# Altium PCB DW1000Breakout.PcbDoc (part 1 of 2)
Units mil, origin at the board's own origin, x right, y up, seen from the top; angles counter-clockwise.
Board outline 2406.34 x 2150.41 mil, 4 copper layers (Component Side, Ground Plane, Power Plane, Solder Side), stack 58 mil thick; 76 components, 60 nets, 321 pads, 242 vias.
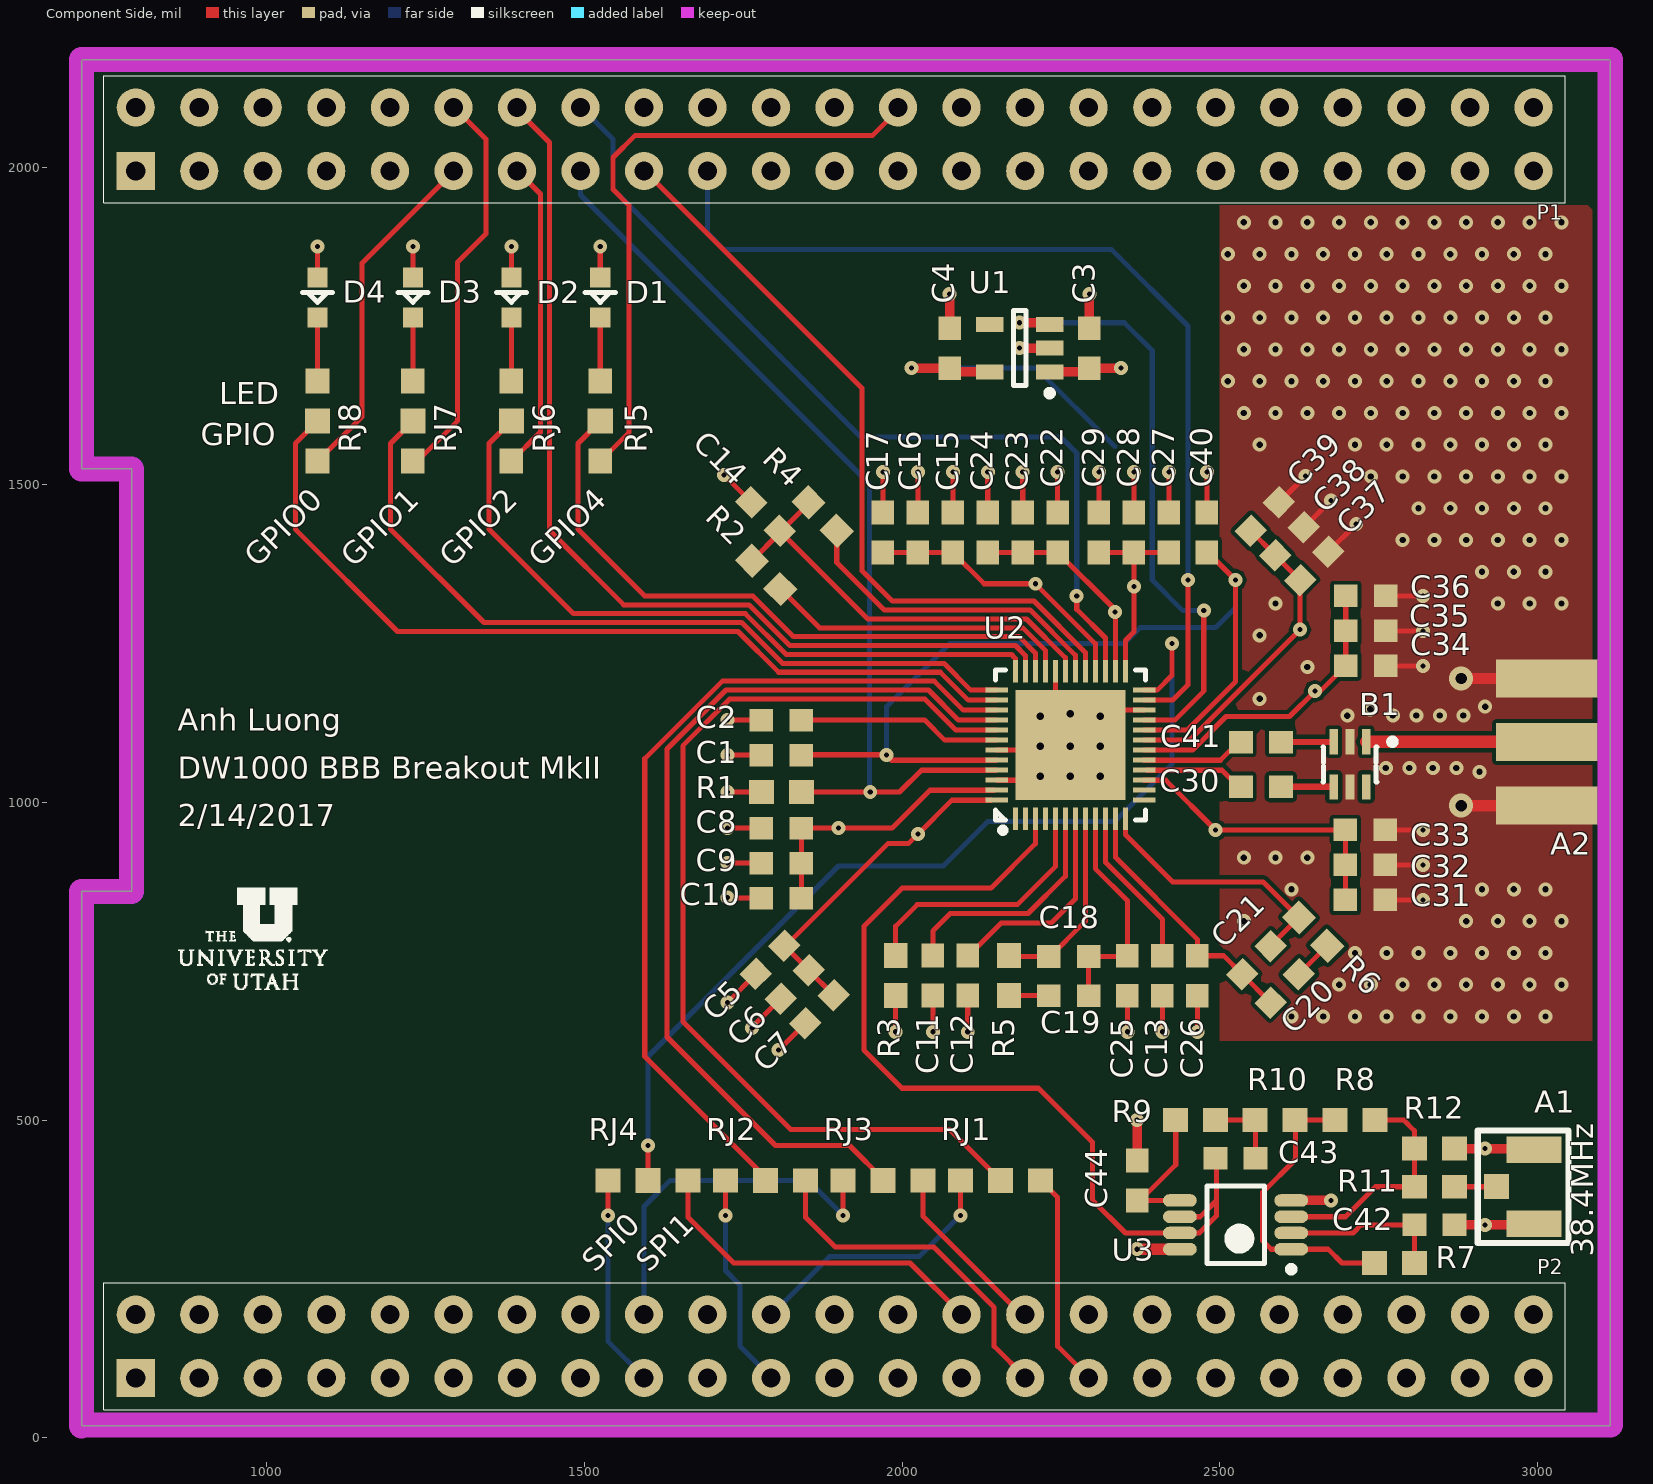
[diagram p0: Component Side view]
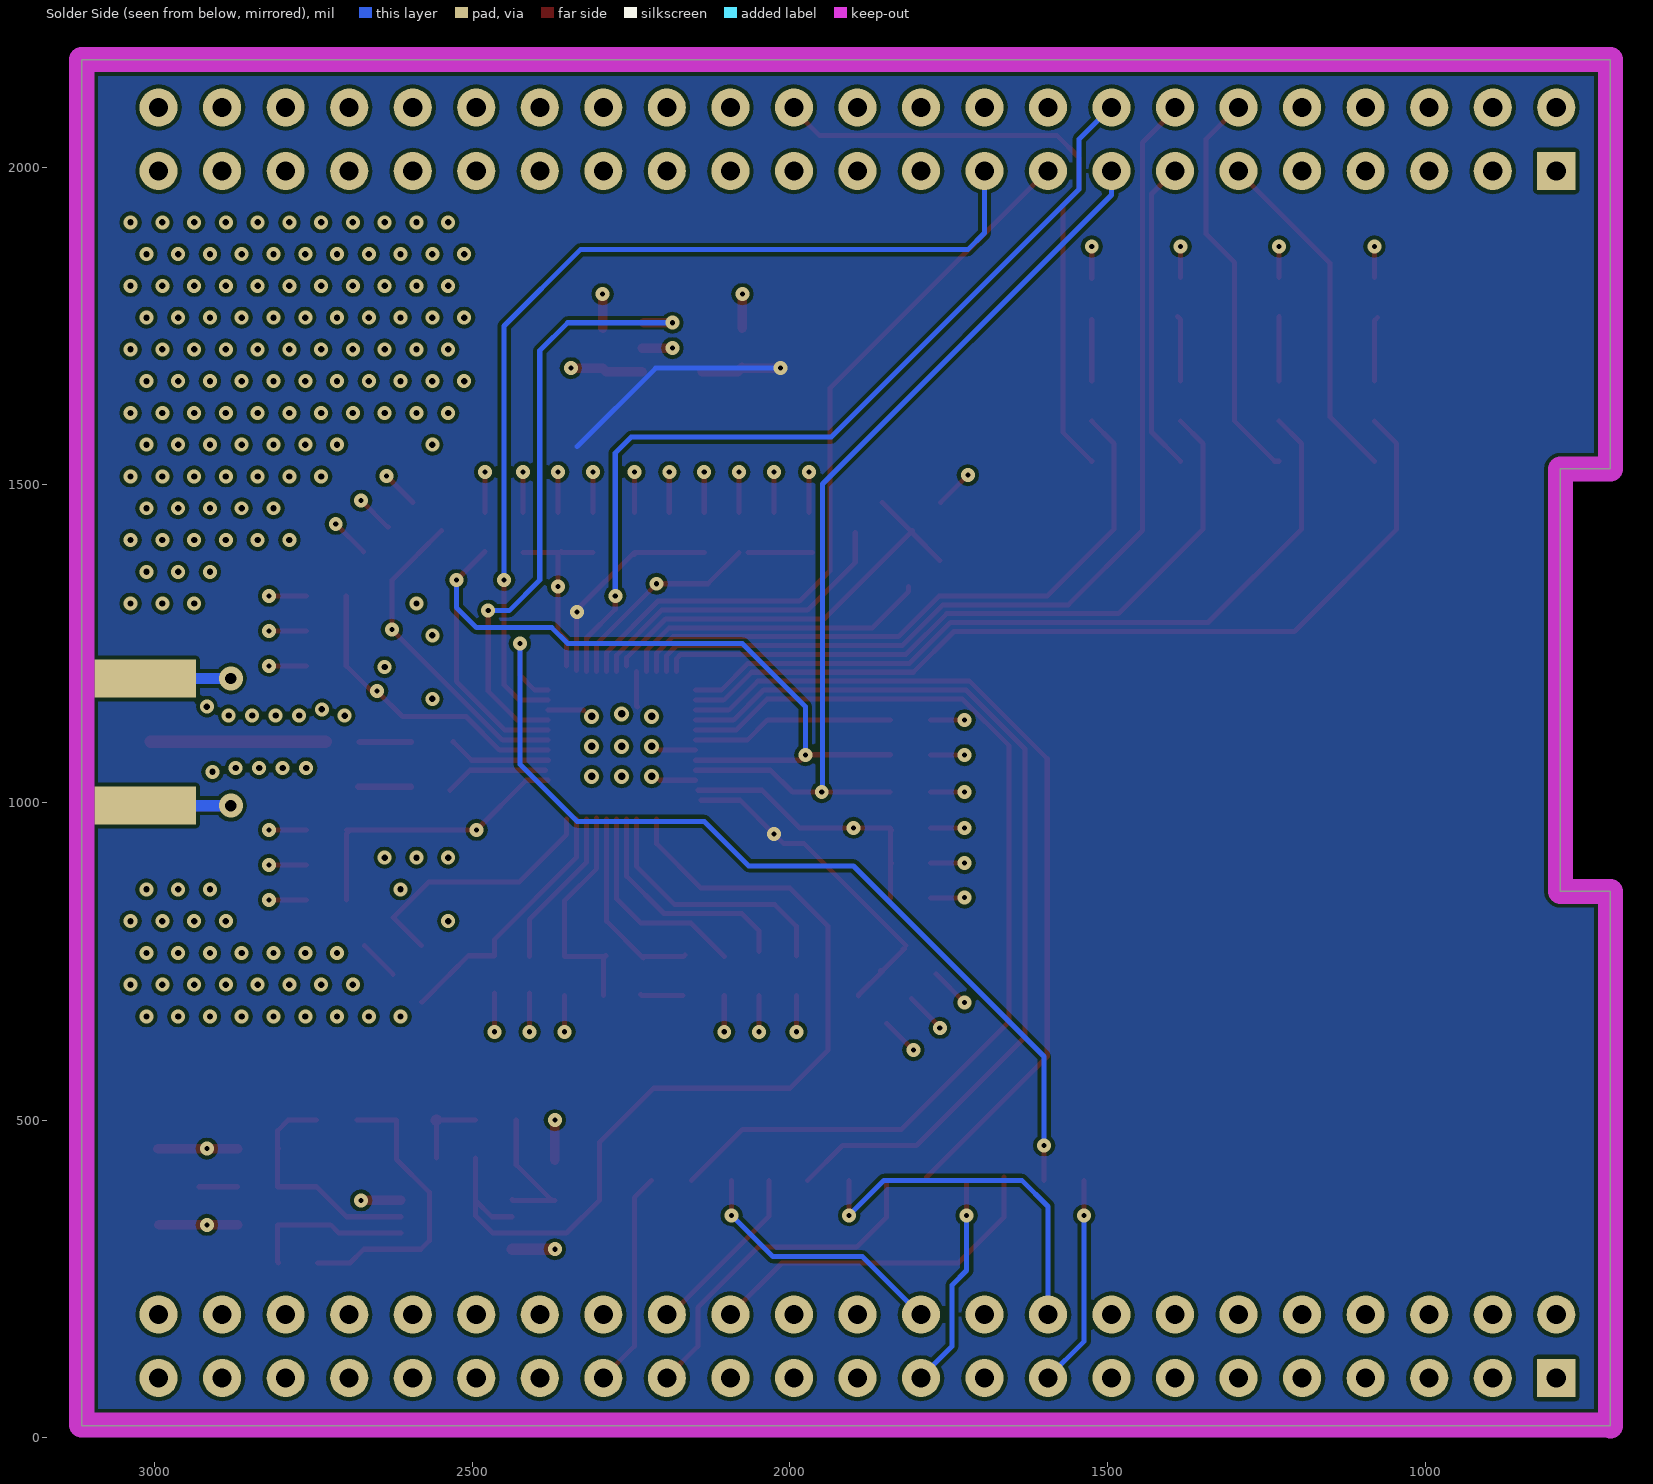
[diagram p1: Solder Side view, seen from below]
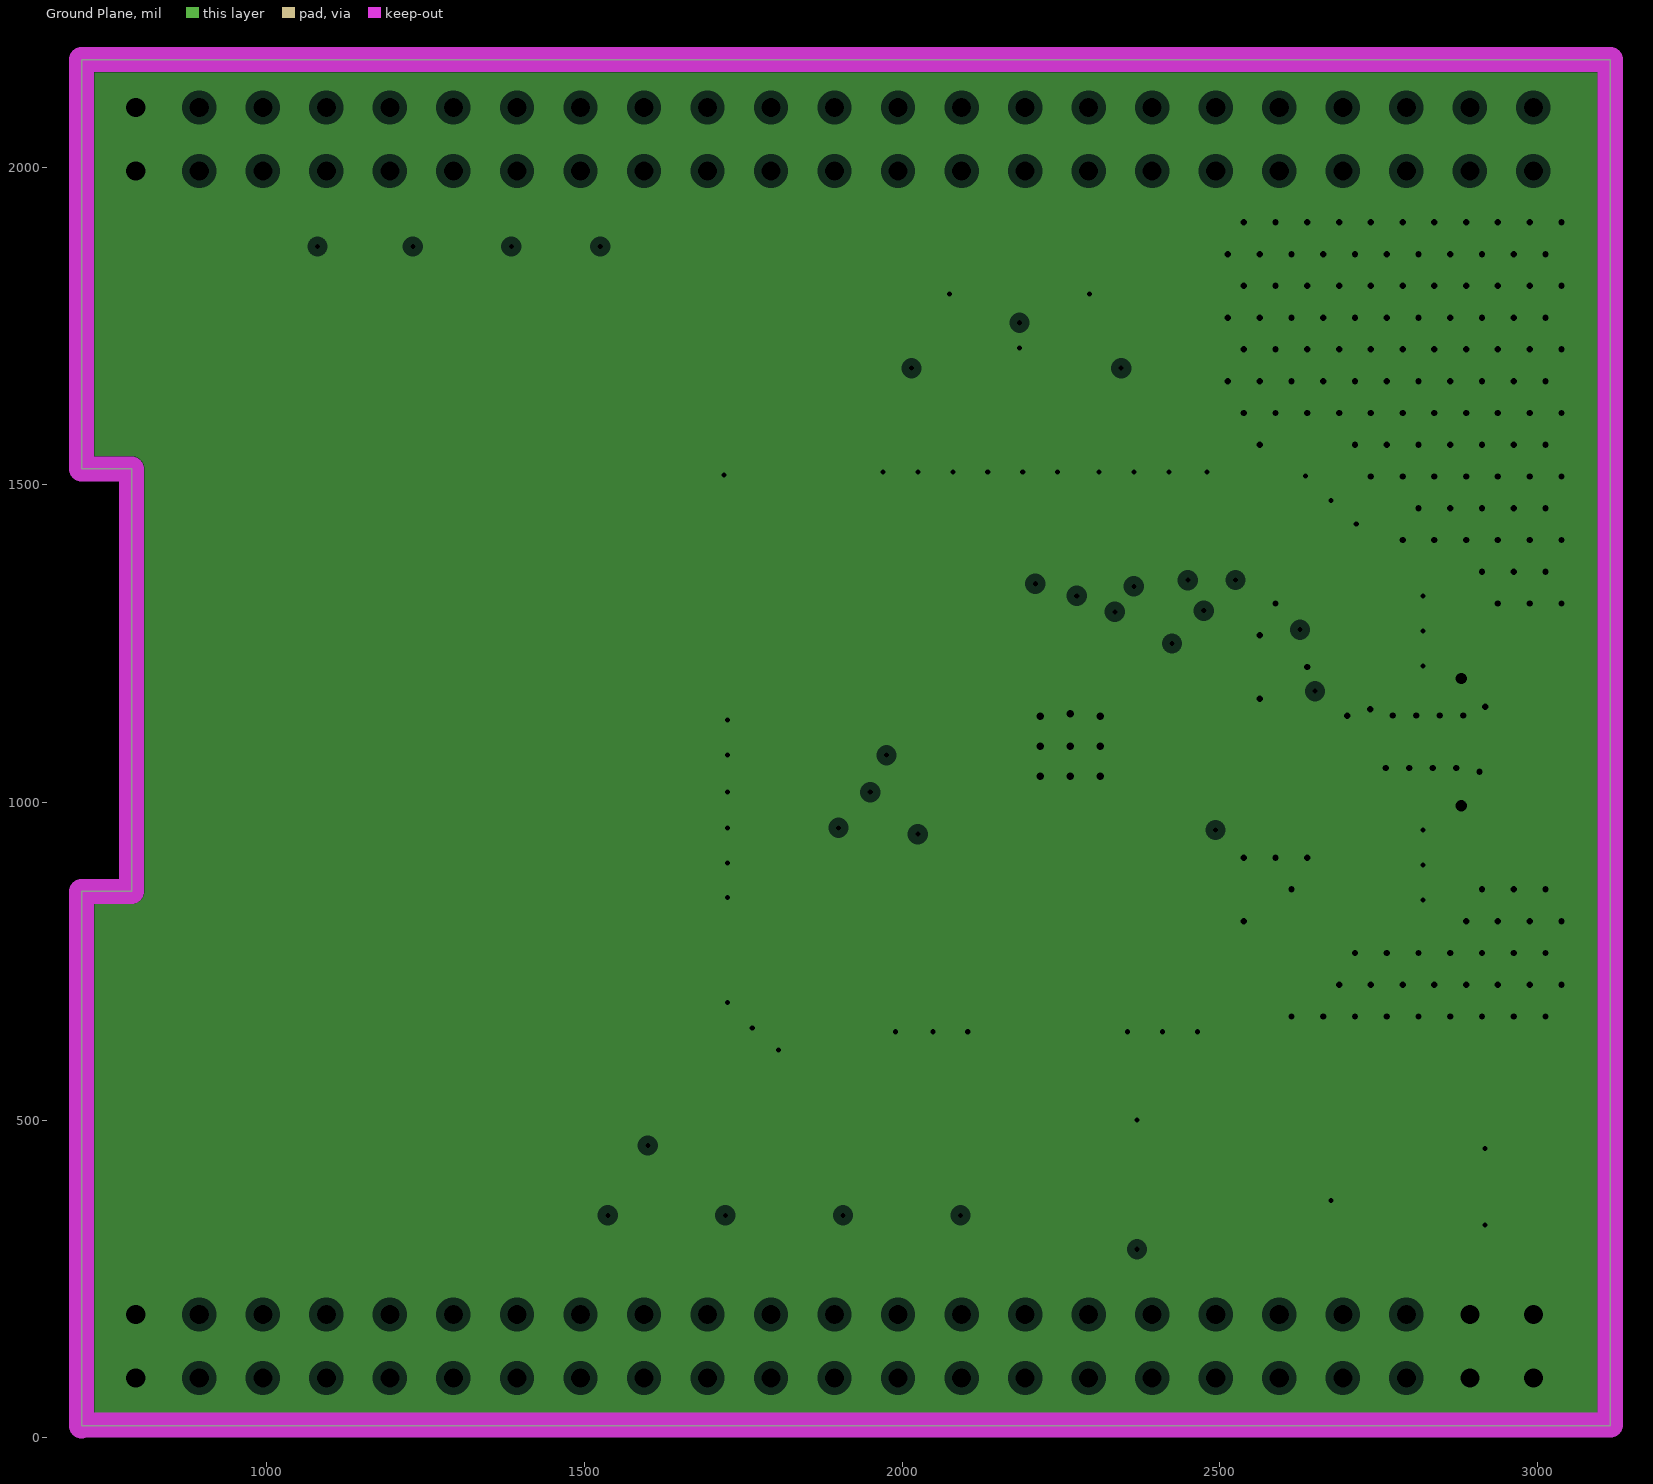
[diagram p2: Ground Plane, clearances drawn from the general rule]
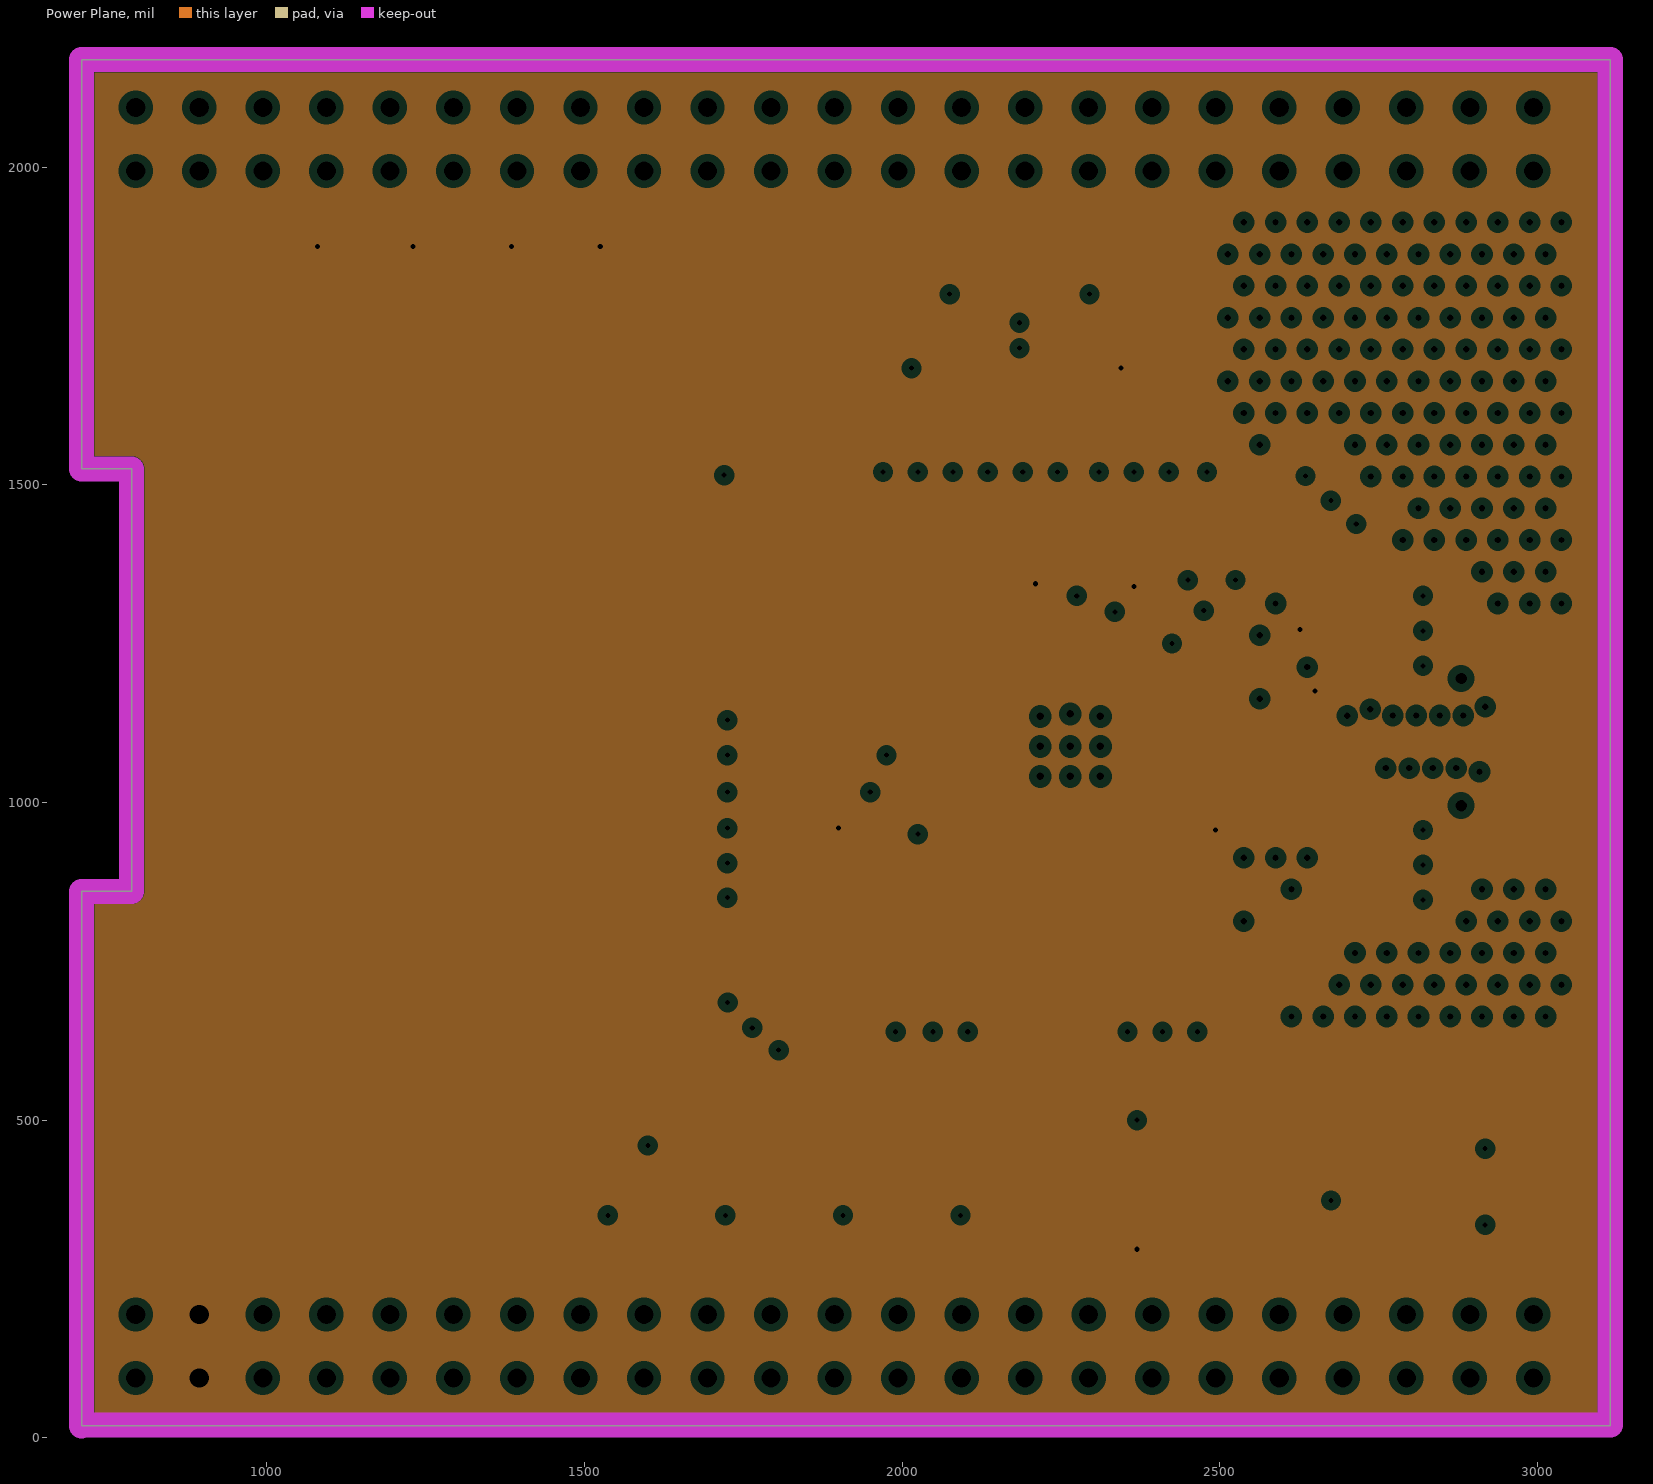
[diagram p3: Power Plane, clearances drawn from the general rule]

## Layer stack, top to bottom
Top Solder: solder mask 0.4, Solder Resist, Dk 3.5
Component Side: signal copper 1.7
Dielectric 1: core 11.9, FR-4, Dk 4.5
Ground Plane: plane copper 1.4, net GND
Dielectric 3: prepreg 28, Core, Dk 4.5
Power Plane: plane copper 1.4, net 3V3
Dielectric 4: core 11.9, FR-4, Dk 4.5
Solder Side: signal copper 1.7
Bottom Solder: solder mask 0.4, Solder Resist, Dk 3.5

## Board outline
708.66,18.73 708.66,860 787.4,860 787.4,1525 708.66,1525 708.66,2169.14 3115,2169.14 3115,18.73

## Design rules (kind name [scope] priority, off if disabled: settings)
Clearance "Clearance~Sunstone Circuits" [All] p1: gap=6 ignorepadtopadclearanceinfootprint=FALSE except(0: Arc-Hole Track-Hole SMDPad-Hole THPad-Hole Via-Hole Fill-Hole Poly-Hole Region-Hole Text-Hole) // Sunstone Circuits Minimum Clearance Rule (MLB~4&6 Layer Designs)
HoleSize "HoleSize~Sunstone Circuits" [All] p1: absolutevalues=TRUE maxlimit=251 minlimit=8 maxpercent=80.000 minpercent=20.000 // Sunstone Circuits Hole Size Rule (MLB~4&6 Layer Designs)
HoleSize Testpoint [All] p2: absolutevalues=TRUE maxlimit=100 minlimit=1 maxpercent=80.000 minpercent=20.000
HoleSize TestPointUsage [All] p3: absolutevalues=TRUE maxlimit=100 minlimit=1 maxpercent=80.000 minpercent=20.000
MinimumAnnularRing "MinimumAnnularRing~Sunstone Circuits" [All] p1: minimumring=7 // Sunstone Circuits Minimum Annular Ring (MLB~4&6 Layer Designs)
PlaneClearance "PlaneClearance~Sunstone Circuits" [All] p1: clearance=12 // Sunstone Circuits Power Plane Clearance Rule (MLB~4&6 Layer Designs)
PlaneConnect "PlaneConnect~Sunstone Circuits" [All] p1: planeconnectstyle=Relief reliefexpansion=10 reliefentries=4 reliefconductorwidth=8 reliefairgap=10 // Sunstone Circuits Power Plane Connect Rule (MLB~4&6 Layer Designs)
PolygonConnect PolygonConnect_GND_Pour [IsPolygon vs InNet('GND')] p1: connectstyle=Direct reliefconductorwidth=10 reliefentries=4 polygonreliefangle="90 Angle" airgapwidth=10
PolygonConnect [IsVia] p2: connectstyle=Direct reliefconductorwidth=10 reliefentries=4 polygonreliefangle="90 Angle" airgapwidth=10
PolygonConnect "PolygonConnect~Sunstone Circuits" [All] p3: connectstyle=Relief reliefconductorwidth=8 reliefentries=4 polygonreliefangle="90 Angle" airgapwidth=10 // Sunstone Circuits Polygon Connect Style (MLB~4&6 Layer Designs)
RoutingVias "RoutingVias~Sunstone Circuits" [All] p1: holewidth=8 width=22 viastyle="Through Hole" minholewidth=8 minwidth=22 maxholewidth=20 maxwidth=40 // Sunstone Circuits Routing Vias Rule (MLB~4&6 Layer Designs)
ShortCircuit "ShortCircuit~Sunstone Circuits" [All] p1: allowed=FALSE // Sunstone Circuits Short Circuit Rule~Do Not Allow (MLB~4&6 Layer Designs)
SolderMaskExpansion "SolderMaskExpansion~Sunstone Circuits" [All] p1: expansion=3 // Sunstone Circuits Solder Mask Expansion Rule (MLB~4&6 Layer Designs)
ViasUnderSMD "ViasUnderSMD~Sunstone Circuits" [All] p1: allowed=FALSE // Sunstone Circuits Vias Under SMD~Do Not Allow (MLB~4&6 Layer Designs)
Width ANT [InNet('ANT')] p1: maxlimit=19.87 minlimit=19.87 preferedwidth=19.87 impedancedriven=TRUE minimp=50.000000 maximp=50.000000 favimp=50.000000
Width "Width~Sunstone Circuits" [All] p2: maxlimit=100 minlimit=6 preferedwidth=8 minimp=50.000000 maximp=50.000000 favimp=50.000000 // Sunstone Circuits Minimum Width Rule (MLB~4&6 Layer Designs)
26 further rules are at their usual default settings.

## Classes and differential pairs
component class DW1000BreakoutPeripherals: A1 A2 C42 C43 C44 D1 D2 D3 D4 P1 P2 R7 R8 R9 R10 R11 R12 RJ1 RJ2 RJ3 RJ4 RJ5 RJ6 RJ7 RJ8 U3 U?
component class DW1000Breakout: B1 C1 C2 C3 C4 C5 C6 C7 C8 C9 C10 C11 C12 C13 C14 C15 C16 C17 C18 C19 C20 C21 C22 C23 C24 C25 C26 C27 C28 C29 C30 C31 C32 C33 C34 C35 C36 C37 C38 C39 C40 C41 R1 R2 R3 R4 R5 R6 U1 U2

## Components (designator, comment, footprint, x,y, rotation, side; value= is the part's Value field where it differs from the comment)
A1 "U.FL-R-SMT(01)" U.FL-R-SMT-1 2995,395 r270 top
A2 "CONSMA003.062" SMA_EDGE_MNT 3015,1095 r270 top
B1 "HHM1595A1" BALUN 2705,1060 r180 top
C1 "GRM188R71C104KA01D" "CAPC1608X08N (0603)" 1810,1074.37 r0 top
C2 "GRM188R71C104KA01D" "CAPC1608X08N (0603)" 1810,1129.37 r0 top
C3 "GRM188R71C104KA01D" "CAPC1608X08N (0603)" 2295,1715 r270 top
C4 "GRM188R71C104KA01D" "CAPC1608X08N (0603)" 2075,1715 r270 top
C5 "GRM188R60J106ME47D" "CAPC1608X08N (0603)" 1792.22,752.15 r45 top
C6 "GRM188R61A105KA61D" "CAPC1608X08N (0603)" 1831.11,713.26 r45 top
C7 "GRM188R71C104KA01D" "CAPC1608X08N (0603)" 1870,674.37 r45 top
C8 "GRM188R60J106ME47D" "CAPC1608X08N (0603)" 1810,959.37 r0 top
C9 "GRM188R61A105KA61D" "CAPC1608X08N (0603)" 1810,904.37 r0 top
C10 "GRM188R71C104KA01D" "CAPC1608X08N (0603)" 1810,849.37 r0 top
C11 "GRM188R71C104KA01D" "CAPC1608X08N (0603)" 2048.48,727.4 r90 top
C12 "GRM188R71C104KA01D" "CAPC1608X08N (0603)" 2103.48,727.4 r90 top
C13 "GRM188R71C104KA01D" "CAPC1608X08N (0603)" 2409.89,727.11 r90 top
C14 "GRM188R71C104KA01D" "CAPC1608X08N (0603)" 1785,1450 r315 top
C15 "GRM188R60J106ME47D" "CAPC1608X08N (0603)" 2080,1425 r270 top
C16 "GRM188R61A105KA61D" "CAPC1608X08N (0603)" 2025,1425 r270 top
C17 "GRM188R71C104KA01D" "CAPC1608X08N (0603)" 1970,1425 r270 top
C18 "GRM1885C1H1R2CA01D" "CAPC1608X08N (0603)" 2262.31,757.4 r180 top
C19 "GRM1885C1H270JA01D" "CAPC1608X08N (0603)" 2262.31,695.91 r0 top
C20 "GRM188R71H821KA01D" "CAPC1608X08N (0603)" 2602.33,707.06 r225 top
C21 "GRM1885C1H180JA01D" "CAPC1608X08N (0603)" 2557.79,751.6 r225 top
C22 "GRM188R60J106ME47D" "CAPC1608X08N (0603)" 2245,1425 r270 top
C23 "GRM188R61A105KA61D" "CAPC1608X08N (0603)" 2190,1425 r270 top
C24 "GRM188R71C104KA01D" "CAPC1608X08N (0603)" 2135,1425 r270 top
C25 "GRM188R71C104KA01D" "CAPC1608X08N (0603)" 2354.89,727.11 r90 top
C26 "GRM188R71C104KA01D" "CAPC1608X08N (0603)" 2464.89,727.11 r90 top
C27 "GRM188R60J106ME47D" "CAPC1608X08N (0603)" 2420,1425 r270 top
C28 "GRM188R61A105KA61D" "CAPC1608X08N (0603)" 2365,1425 r270 top
C29 "GRM188R71C104KA01D" "CAPC1608X08N (0603)" 2310,1425 r270 top
C30 "GRM1885C1H120JA01D" "CAPC1608X08N (0603)" 2565,1024.57 r180 top
C31 "GRM188R60J106ME47D" "CAPC1608X08N (0603)" 2729.31,846.57 r180 top
C32 "GRM188R61A105KA61D" "CAPC1608X08N (0603)" 2729.31,901.57 r180 top
C33 "GRM188R71C104KA01D" "CAPC1608X08N (0603)" 2729.31,956.57 r180 top
C34 "GRM188R60J106ME47D" "CAPC1608X08N (0603)" 2730,1215 r180 top
C35 "GRM188R61A105KA61D" "CAPC1608X08N (0603)" 2730,1270 r180 top
C36 "GRM188R71C104KA01D" "CAPC1608X08N (0603)" 2730,1325 r180 top
C37 "GRM188R60J106ME47D" "CAPC1608X08N (0603)" 2648.86,1372.08 r225 top
C38 "GRM188R61A105KA61D" "CAPC1608X08N (0603)" 2609.97,1410.97 r225 top
C39 "GRM188R71C104KA01D" "CAPC1608X08N (0603)" 2571.08,1449.86 r225 top
C40 "GRM188R71C104KA01D" "CAPC1608X08N (0603)" 2480,1425 r270 top
C41 "GRM1885C1H120JA01D" "CAPC1608X08N (0603)" 2565,1095 r180 top
C42 "GRM033R71C102KA01D" "CAPC1608X08N (0603)" 2837.99,335 r180 top
C43 "GRM1885C1H202JA01D" "CAPC1608X08N (0603)" 2525,440 r0 top
C44 "GRM033R71C102KA01D" "CAPC1608X08N (0603)" 2370,405 r270 top
D1 "LG Q971-KN-1" CHIPLED0603 1525,1795 r270 top
D2 "LG Q971-KN-1" CHIPLED0603 1385,1795 r270 top
D3 "LG Q971-KN-1" CHIPLED0603 1230,1795 r270 top
D4 "LG Q971-KN-1" CHIPLED0603 1080,1795 r270 top
P1 "PREC023DAAN-RC" HEADER23X2 1893.83,2043.81 r0 top locked
P2 "PREC023DAAN-RC" HEADER23X2 1893.83,143.81 r0 top locked
R1 "MCR03ERTJ104" "RESC1608X06N (0603)" 1810,1016.2 r180 top
R2 "MCR03ERTJ103" "RESC1608X06N (0603)" 1786.11,1358.18 r135 top
R3 "MCR03ERTJ113" "RESC1608X06N (0603)" 1989.97,727.4 r90 top
R4 "MCR03ERTJ103" "RESC1608X06N (0603)" 1875,1450 r135 top
R5 "MCR03ERTJ163" "RESC1608X06N (0603)" 2168.48,727.4 r90 top
R6 "MCR03ERTJ271" "RESC1608X06N (0603)" 2647.23,796.5 r135 top
R7 "MCR03ERTJ180" "RESC1608X06N (0603)" 2775,275 r180 top
R8 "MCR03ERTJ102" "RESC1608X06N (0603)" 2712.99,500 r180 top
R9 "MCR03ERTJ2R7" "RESC1608X06N (0603)" 2462.33,500 r0 top
R10 "MCR03ERTJ2R7" "RESC1608X06N (0603)" 2587.29,500 r0 top
R11 "MCR03ERTJ102" "RESC1608X06N (0603)" 2837.99,395 r180 top
R12 "MCR03ERTJ102" "RESC1608X06N (0603)" 2837.99,455 r180 top
RJ1 "R_J" RJ 2155,405 r180 top value=DNP
RJ2 "R_J" RJ 1785,405 r180 top value=DNP
RJ3 "R_J" RJ 1970,405 r180 top value=DNP
RJ4 "R_J" RJ 1600,405 r180 top value=DNP
RJ5 "R_J" RJ 1525,1600 r270 top value=DNP
RJ6 "R_J" RJ 1385,1600 r270 top value=DNP
RJ7 "R_J" RJ 1230,1600 r270 top value=DNP
RJ8 "R_J" RJ 1080,1600 r270 top value=DNP
U1 "LP5907MFX-1.8/NOPB" SOT95P280X145-5N 2185,1715 r180 top
U2 "DW1000 IC" QFN-48 2265,1090 r90 top
U3 "LMV822MM/NOPB" TSOP65P490X110-8N 2525,335 r180 top

## Footprints (in the part's own frame and the unit in brackets; to place one, negate y for a bottom-side part, rotate by r counter-clockwise, add the part's x,y. Pads: shape width x height; smd on the part's side, far side on the other; paste and mask are expansions set on the pad)
BALUN [mm]
  rect 0.35x1 smd: 1(-0.65,-0.9) 2(0,-0.9) 3(0.65,-0.9) 4(0.65,0.9) 5(0,0.9) 6(-0.65,0.9)
  silkscreen extent -1.83,-1.02 1.07,0.7, body extent -1.05,-0.67 1.05,0.67, height 0.95
"CAPC1608X08N (0603)" [mm] "Chip Capacitor, 2-Leads, Body 1.60x0.80mm, IPC Medium Density"
  rect 0.95x0.9 smd: 1(-0.8,0) 2(0.8,0)
  body extent -0.85,-0.45 0.85,0.45, height 0.8
CHIPLED0603 [mm]
  rect 0.8x0.8 smd: 1(-0.8,0) 2(0.8,0)
  silkscreen extent -0.2,-0.6 0.2,0.6, body extent -0.81,-0.4 0.81,0.4, height 0.6
HEADER23X2 [mil] "HEADER23X2"
  rect 60x60 hole 30 mask+2: 1(-1100,-50)
  round 60 hole 30 mask+2: 2(-1100,50) 3(-1000,-50) 4(-1000,50) 5(-900,-50) 6(-900,50) 7(-800,-50) 8(-800,50) 9(-700,-50) 10(-700,50) 11(-600,-50) 12(-600,50) 13(-500,-50) 14(-500,50) 15(-400,-50) 16(-400,50) 17(-300,-50) 18(-300,50) 19(-200,-50) 20(-200,50) 21(-100,-50) 22(-100,50) 23(0,-50) 24(0,50) 25(100,-50) 26(100,50) 27(200,-50) 28(200,50) 29(300,-50) 30(300,50) 31(400,-50) 32(400,50) 33(500,-50) 34(500,50) 35(600,-50) 36(600,50) 37(700,-50) 38(700,50) 39(800,-50) 40(800,50) 41(900,-50) 42(900,50) 43(1000,-50) 44(1000,50) 45(1100,-50) 46(1100,50)
  silkscreen extent -1150,-100 1150,100
QFN-48 [mm] "48 Pin QFN"
  rect 0.9x0.2 smd mask+0.05: 1(-2.95,2.2) 2(-2.95,1.8) 3(-2.95,1.4) 4(-2.95,1) 5(-2.95,0.6) 6(-2.95,0.2) 7(-2.95,-0.2) 8(-2.95,-0.6) 9(-2.95,-1) 10(-2.95,-1.4) 11(-2.95,-1.8) 12(-2.95,-2.2) 25(2.95,-2.2) 26(2.95,-1.8) 27(2.95,-1.4) 28(2.95,-1) 29(2.95,-0.6) 30(2.95,-0.2) 31(2.95,0.2) 32(2.95,0.6) 33(2.95,1) 34(2.95,1.4) 35(2.95,1.8) 36(2.95,2.2)
  rect 0.2x0.9 smd mask+0.05: 13(-2.2,-2.95) 14(-1.8,-2.95) 15(-1.4,-2.95) 16(-1,-2.95) 17(-0.6,-2.95) 18(-0.2,-2.95) 19(0.2,-2.95) 20(0.6,-2.95) 21(1,-2.95) 22(1.4,-2.95) 23(1.8,-2.95) 24(2.2,-2.95) 37(2.2,2.95) 38(1.8,2.95) 39(1.4,2.95) 40(1,2.95) 41(0.6,2.95) 42(0.2,2.95) 43(-0.2,2.95) 44(-0.6,2.95) 45(-1,2.95) 46(-1.4,2.95) 47(-1.8,2.95) 48(-2.2,2.95)
  rect 4.4x4.4 smd paste-4.4 mask+0.05: 49(0,0)
  rect 1.3x1.3 on Top Paste mask+0.05: Paste1(0,0) Paste2(-1.45,1.45) Paste3(-1.45,-1.45) Paste4(1.45,-1.45) Paste5(1.45,1.45) Paste6(1.45,0) Paste7(-1.45,0) Paste8(0,1.45) Paste9(0,-1.45)
  silkscreen extent -3.5,-3 3,3, body extent -3,-3 3,3, height 1
"RESC1608X06N (0603)" [mm] "Chip Resistor, 2-Leads, Body 1.60x0.80mm, IPC Medium Density"
  rect 1x0.95 smd: 1(-0.8,0) 2(0.8,0)
  body extent -0.85,-0.45 0.85,0.45, height 0.55
RJ [mm] "0 Ohm Resistor Jumper"
  rect 1x1 smd: 1(0,0)
  rect 1x0.95 smd: 2(1.6,0) 3(-1.6,0)
  body extent -0.05,-0.45 1.65,0.45, height 0.55
SMA_EDGE_MNT [mm]
  rect 1.52x4.06 smd: 1(0,0) 2(-2.54,0) 3(2.54,0)
  rect 1.52x4.06 smd far side: 4(-2.54,0) 5(2.54,0)
  Component Side lines w0.457: 2.54,-3.429 2.54,0 ; -2.54,-3.429 -2.54,0
  Solder Side lines w0.457: 2.54,-3.429 2.54,0 ; -2.54,-3.429 -2.54,0
  body extent -3.18,-1.27 3.17,12.06, height 3.57
SOT95P280X145-5N [mm] "SOT23, 5-Leads, Body 2.90x2.80mm, Pitch 0.95mm, IPC Medium Density"
  rect 1.1x0.6 smd: 1(-1.2,0.95) 2(-1.2,0) 3(-1.2,-0.95) 4(1.2,-0.95) 5(1.2,0.95)
  silkscreen extent -1.33,-1.5 0.25,1.92, body extent -0.85,-1.5 0.85,1.5, height 1.45
TSOP65P490X110-8N [mm] "TSOP, 8-Leads, Body 3.00x3.00mm, Pitch 0.65mm, IPC Medium Density"
  oval 1.35x0.5 smd: 1(-2.225,0.975) 2(-2.225,0.325) 3(-2.225,-0.325) 4(-2.225,-0.975) 5(2.225,-0.975) 6(2.225,-0.325) 7(2.225,0.325) 8(2.225,0.975)
  silkscreen extent -2.35,-1.55 1.15,1.9, body extent -2.45,-1.55 2.45,1.55, height 1.1
U.FL-R-SMT-1 [mm] "U.FL-R-SMT-1"
  rect 1x1 smd: 1(0,-1.5)
  rect 1.05x2.2 smd: 2(-1.475,0) 3(1.475,0)
  silkscreen extent -2.25,-2.25 2.25,1.38, body extent -1.5,-1.55 1.5,1.55, height 1.26

## Part data
A1: "CONN UMC JACK STR 50 OHM SMD", Dielectric Material="Liquid Crystal Polymer (LCP)", Frequency - Max=6GHz, Housing Color=Silver, Manufacturer="Hirose Electric Co Ltd", Operating Temperature="-40°C ~ 90°C", Voltage Rating=-, Body Finish=Silver, Body Material="Phosphor Bronze", Cable Group=-, Category="Connectors, Interconnects", Center Contact Material="Phosphor Bronze", Center Contact Plating=Gold, ComponentLink1Description=http://www.hirose.co.jp/cataloge_hp/e32119372.pdf, ComponentLink1URL=http://www.hirose.co.jp/cataloge_hp/e32119372.pdf, Connector Style="Ultra Miniature Coaxial", Connector Type="Jack, Male Pin", Contact Termination=Solder, Fastening Type=Snap-On, Features=-, Impedance="50 Ohm", Ingress Protection=-, Manufacturer Part Number=U.FL-R-SMT(01), Mounting Type="Surface Mount", Packaging=Bulk, Pricing 1="1=1.28, 10=1.122, 25=1.056, 50=1.012, 100=0.968, 250=0.88, 500=0.792, 1000=0.704, 2500=0.638 (USD)", RoHS="RoHS Compliant", Shield Termination=Solder, Stock 1=22286, Supplier 1=Digi-Key
A2: "CONN SMA JACK 50 OHM EDGE MNT", Dielectric Material="Polytetrafluoroethylene (PTFE)", Frequency - Max=-, Housing Color=Silver, Manufacturer="Linx Technologies Inc", Operating Temperature="-65°C ~ 165°C", Body Finish=Nickel, Body Material=Brass, Cable Group=-, Category="Connectors, Interconnects", Center Contact Material="Beryllium Copper", Center Contact Plating=Gold, ComponentLink1Description=http://www.linxtechnologies.com/resources/diagrams/consma003.062.pdf, ComponentLink1URL=http://www.linxtechnologies.com/resources/diagrams/consma003.062.pdf, Connector Style=SMA, Connector Type="Jack, Female Socket", Contact Termination=Solder, Fastening Type=Threaded, Features=-, Impedance="50 Ohm", Ingress Protection=-, Manufacturer Part Number=CONSMA003.062, Mounting Type="Board Edge, End Launch", Packaging=Bulk, Pricing 1="1=3.37, 25=3.09, 100=2.81, 500=2.6125 (USD)", RoHS="RoHS Compliant", Shield Termination=Solder, Stock 1=6857, Supplier 1=Digi-Key, Voltage Rating=-
B1: "XFMR BALUN RF 3.0-8.0GHZ UWB SMD", Frequency Range="3GHz ~ 8GHz", Manufacturer="TDK Corporation", Package / Case="0805 (2012 Metric)", Supplier Part Number 1=445-3387-1-ND, Category="RF/IF and RFID", ComponentLink1Description=https://product.tdk.com/info/en/documents/data_sheet/rf_balun_hhm1595a1_en.pdf, ComponentLink1URL=https://product.tdk.com/info/en/documents/data_sheet/rf_balun_hhm1595a1_en.pdf, Impedance - Unbalanced/Balanced="50 / 100 Ohm", Insertion Loss (Max)=1.5dB, Manufacturer Part Number=HHM1595A1, Mounting Type="Surface Mount", Packaging="Cut Tape (CT)", Part Status=Active, Phase Difference="180° ±20", Pricing 1="1=1.38, 10=1.348, 100=0.7356, 250=0.66, 500=0.64626, 1000=0.4675 (USD)", Return Loss (Min)=8dB, RoHS="RoHS Compliant", Stock 1=20610, Supplier 1=Digi-Key
C1 C2 C3 C4 C7 C10 C11 C12 C13 C14 C17 C24 C25 C26 C29 C33 C36 C39 C40: "CAP CER 0.1UF 16V 10% X7R 0603", Capacitance=0.1µF, Manufacturer="Murata Electronics North America", Operating Temperature="-55°C ~ 125°C", Package / Case="0603 (1608 Metric)", Ratings=-, Temperature Coefficient=X7R, Tolerance=±10%, Voltage - Rated=16V, Applications="General Purpose", Category=Capacitors, ComponentLink1Description=http://search.murata.co.jp/Ceramy/image/img/A01X/G101/ENG/GRM188R71C104KA01-01.pdf, ComponentLink1URL=http://search.murata.co.jp/Ceramy/image/img/A01X/G101/ENG/GRM188R71C104KA01-01.pdf, Features=-, Height - Seated (Max)=-, Lead Spacing=-, Lead Style=-, Manufacturer Part Number=GRM188R71C104KA01D, Mounting Type="Surface Mount, MLCC", Packaging="Cut Tape (CT)", Pricing 1="1=0.1, 10=0.019, 50=0.0102, 100=0.0086, 250=0.00704, 500=0.006, 1000=0.00468 (USD)", RoHS="RoHS Compliant", Size / Dimension="0.063\" L x 0.031\" W (1.60mm x 0.80mm)", Stock 1=1458181, Supplier 1=Digi-Key, Thickness (Max)="0.035\" (0.90mm)"
C5 C8 C15 C22 C27 C31 C34 C37: "CAP CER 10UF 6.3V 20% X5R 0603", Capacitance=10µF, Manufacturer="Murata Electronics North America", Operating Temperature="-55°C ~ 85°C", Package / Case="0603 (1608 Metric)", Ratings=-, Temperature Coefficient=X5R, Tolerance=±20%, Voltage - Rated=6.3V, Applications="General Purpose", Category=Capacitors, ComponentLink1Description=http://search.murata.co.jp/Ceramy/image/img/A01X/G101/ENG/GRM188R60J106ME47-01.pdf, ComponentLink1URL=http://search.murata.co.jp/Ceramy/image/img/A01X/G101/ENG/GRM188R60J106ME47-01.pdf, Features=-, Height - Seated (Max)=-, Lead Spacing=-, Lead Style=-, Manufacturer Part Number=GRM188R60J106ME47D, Mounting Type="Surface Mount, MLCC", Packaging=Digi-Reel®, Pricing 1="1=0.24, 10=0.2, 50=0.1126, 100=0.1, 250=0.075, 500=0.06626, 1000=0.05875 (USD)", RoHS="RoHS Compliant", Size / Dimension="0.063\" L x 0.031\" W (1.60mm x 0.80mm)", Stock 1=2128324, Supplier 1=Digi-Key, Supplier 2=Digi-Key, Thickness (Max)="0.035\" (0.90mm)"
C6 C9 C16 C23 C28 C32 C35 C38: "CAP CER 1UF 10V 10% X5R 0603", Capacitance=1.0µF, Manufacturer="Murata Electronics North America", Operating Temperature="-55°C ~ 85°C", Package / Case="0603 (1608 Metric)", Ratings=-, Temperature Coefficient=X5R, Tolerance=±10%, Voltage - Rated=10V, Applications="General Purpose", Category=Capacitors, ComponentLink1Description=http://search.murata.co.jp/Ceramy/image/img/A01X/G101/ENG/GRM188R61A105KA61-01.pdf, ComponentLink1URL=http://search.murata.co.jp/Ceramy/image/img/A01X/G101/ENG/GRM188R61A105KA61-01.pdf, Features=-, Height - Seated (Max)=-, Lead Spacing=-, Lead Style=-, Manufacturer Part Number=GRM188R61A105KA61D, Mounting Type="Surface Mount, MLCC", Packaging="Cut Tape (CT)", Pricing 1="1=0.1, 10=0.041, 50=0.0224, 100=0.019, 250=0.01552, 500=0.01328, 1000=0.01035 (USD)", RoHS="RoHS Compliant", Size / Dimension="0.063\" L x 0.031\" W (1.60mm x 0.80mm)", Stock 1=244919, Supplier 1=Digi-Key, Thickness (Max)="0.035\" (0.90mm)"
C18: "CAP CER 1.2PF 50V NP0 0603", Capacitance=1.2pF, Manufacturer="Murata Electronics North America", Operating Temperature="-55°C ~ 125°C", Package / Case="0603 (1608 Metric)", Ratings=-, Supplier Part Number 1=490-10709-1-ND, Temperature Coefficient="C0G, NP0", Tolerance=±0.25pF, Voltage - Rated=50V, Applications="General Purpose", Category=Capacitors, ComponentLink1Description=http://www.murata.com/~/media/webrenewal/support/library/catalog/products/capacitor/mlcc/c02e.pdf, ComponentLink1URL=http://www.murata.com/~/media/webrenewal/support/library/catalog/products/capacitor/mlcc/c02e.pdf, Features=-, Height - Seated (Max)=-, Lead Spacing=-, Lead Style=-, Manufacturer Part Number=GRM1885C1H1R2CA01D, Mounting Type="Surface Mount, MLCC", Packaging="Cut Tape (CT)", Part Status=Active, Pricing 1="1=0.1, 10=0.053, 50=0.0286, 100=0.0242, 250=0.0198, 500=0.01694, 1000=0.0132 (USD)", RoHS="RoHS Compliant", Size / Dimension="0.063\" L x 0.031\" W (1.60mm x 0.80mm)", Stock 1=36680, Supplier 1=Digi-Key, Thickness (Max)="0.035\" (0.90mm)"
C19: "CAP CER 27PF 50V NP0 0603", Capacitance=27pF, Manufacturer="Murata Electronics North America", Operating Temperature="-55°C ~ 125°C", Package / Case="0603 (1608 Metric)", Ratings=-, Supplier Part Number 1=490-1413-1-ND, Temperature Coefficient="C0G, NP0", Tolerance=±5%, Voltage - Rated=50V, Applications="General Purpose", Category=Capacitors, ComponentLink1Description=http://www.murata.com/~/media/webrenewal/support/library/catalog/products/capacitor/mlcc/c02e.pdf, ComponentLink1URL=http://www.murata.com/~/media/webrenewal/support/library/catalog/products/capacitor/mlcc/c02e.pdf, Features=-, Height - Seated (Max)=-, Lead Spacing=-, Lead Style=-, Manufacturer Part Number=GRM1885C1H270JA01D, Mounting Type="Surface Mount, MLCC", Packaging="Cut Tape (CT)", Part Status=Active, Pricing 1="1=0.1, 10=0.041, 50=0.0222, 100=0.0187, 250=0.01532, 500=0.0131, 1000=0.0102 (USD)", RoHS="RoHS Compliant", Size / Dimension="0.063\" L x 0.031\" W (1.60mm x 0.80mm)", Stock 1=113117, Supplier 1=Digi-Key, Thickness (Max)="0.035\" (0.90mm)"
C20: "CAP CER 820PF 50V X7R 0603", Capacitance=820pF, Manufacturer="Murata Electronics North America", Operating Temperature="-55°C ~ 125°C", Package / Case="0603 (1608 Metric)", Ratings=-, Supplier Part Number 1=490-1493-1-ND, Temperature Coefficient=X7R, Tolerance=±10%, Voltage - Rated=50V, Applications="General Purpose", Category=Capacitors, ComponentLink1Description=http://www.murata.com/~/media/webrenewal/support/library/catalog/products/capacitor/mlcc/c02e.pdf, ComponentLink1URL=http://www.murata.com/~/media/webrenewal/support/library/catalog/products/capacitor/mlcc/c02e.pdf, Features=-, Height - Seated (Max)=-, Lead Spacing=-, Lead Style=-, Manufacturer Part Number=GRM188R71H821KA01D, Mounting Type="Surface Mount, MLCC", Packaging="Cut Tape (CT)", Part Status=Active, Pricing 1="1=0.1, 10=0.067, 25=0.0476, 50=0.0364, 100=0.0308, 250=0.0252, 500=0.02156, 1000=0.0168 (USD)", RoHS="RoHS Compliant", Size / Dimension="0.063\" L x 0.031\" W (1.60mm x 0.80mm)", Stock 1=61936, Supplier 1=Digi-Key, Thickness (Max)="0.035\" (0.90mm)"
C21: "CAP CER 18PF 50V NP0 0603", Capacitance=18pF, Manufacturer="Murata Electronics North America", Operating Temperature="-55°C ~ 125°C", Package / Case="0603 (1608 Metric)", Ratings=-, Supplier Part Number 1=490-1409-1-ND, Temperature Coefficient="C0G, NP0", Tolerance=±5%, Voltage - Rated=50V, Applications="General Purpose", Category=Capacitors, ComponentLink1Description=http://www.murata.com/~/media/webrenewal/support/library/catalog/products/capacitor/mlcc/c02e.pdf, ComponentLink1URL=http://www.murata.com/~/media/webrenewal/support/library/catalog/products/capacitor/mlcc/c02e.pdf, Features=-, Height - Seated (Max)=-, Lead Spacing=-, Lead Style=-, Manufacturer Part Number=GRM1885C1H180JA01D, Mounting Type="Surface Mount, MLCC", Packaging="Cut Tape (CT)", Part Status=Active, Pricing 1="1=0.1, 10=0.041, 50=0.0222, 100=0.0187, 250=0.01532, 500=0.0131, 1000=0.0102 (USD)", RoHS="RoHS Compliant", Size / Dimension="0.063\" L x 0.031\" W (1.60mm x 0.80mm)", Stock 1=281577, Supplier 1=Digi-Key, Thickness (Max)="0.035\" (0.90mm)"
C30 C41: "CAP CER 12PF 50V NP0 0603", Capacitance=12pF, Manufacturer="Murata Electronics North America", Operating Temperature="-55°C ~ 125°C", Package / Case="0603 (1608 Metric)", Ratings=-, Supplier Part Number 1=490-1405-1-ND, Temperature Coefficient="C0G, NP0", Tolerance=±5%, Voltage - Rated=50V, Applications="General Purpose", Category=Capacitors, ComponentLink1Description=http://www.murata.com/~/media/webrenewal/support/library/catalog/products/capacitor/mlcc/c02e.pdf, ComponentLink1URL=http://www.murata.com/~/media/webrenewal/support/library/catalog/products/capacitor/mlcc/c02e.pdf, Features=-, Height - Seated (Max)=-, Lead Spacing=-, Lead Style=-, Manufacturer Part Number=GRM1885C1H120JA01D, Mounting Type="Surface Mount, MLCC", Packaging="Cut Tape (CT)", Part Status=Active, Pricing 1="1=0.1, 10=0.041, 50=0.0222, 100=0.0187, 250=0.01532, 500=0.0131, 1000=0.0102 (USD)", RoHS="RoHS Compliant", Size / Dimension="0.063\" L x 0.031\" W (1.60mm x 0.80mm)", Stock 1=151484, Supplier 1=Digi-Key, Thickness (Max)="0.035\" (0.90mm)"
C42 C44: "CAP CER 1000PF 16V 10% X7R 0201", Capacitance=1000pF, Manufacturer="Murata Electronics North America", Operating Temperature="-55°C ~ 125°C", Package / Case="0201 (0603 Metric)", Ratings=-, Temperature Coefficient=X7R, Tolerance=±10%, Voltage - Rated=16V, Applications="General Purpose", Category=Capacitors, ComponentLink1Description=http://search.murata.co.jp/Ceramy/image/img/A01X/G101/ENG/GRM033R71C102KA01-01.pdf, ComponentLink1URL=http://search.murata.co.jp/Ceramy/image/img/A01X/G101/ENG/GRM033R71C102KA01-01.pdf, Features=-, Height - Seated (Max)=-, Lead Spacing=-, Lead Style=-, Manufacturer Part Number=GRM033R71C102KA01D, Mounting Type="Surface Mount, MLCC", Packaging="Cut Tape (CT)", Pricing 1="1=0.1, 10=0.025, 50=0.0134, 100=0.0113, 250=0.00924, 500=0.0079, 1000=0.00615, 5000=0.00513 (USD)", RoHS="RoHS Compliant", Size / Dimension="0.024\" L x 0.012\" W (0.60mm x 0.30mm)", Stock 1=938390, Supplier 1=Digi-Key, Thickness (Max)="0.013\" (0.33mm)"
C43: "CAP CER 2000PF 50V NP0 0603", Capacitance=2000pF, Manufacturer="Murata Electronics North America", Operating Temperature="-55°C ~ 125°C", Package / Case="0603 (1608 Metric)", Ratings=-, Supplier Part Number 1=490-1458-1-ND, Temperature Coefficient="C0G, NP0", Tolerance=±5%, Voltage - Rated=50V, Applications="General Purpose", Category=Capacitors, ComponentLink1Description=http://www.murata.com/~/media/webrenewal/support/library/catalog/products/capacitor/mlcc/c02e.ashx, ComponentLink1URL=http://www.murata.com/~/media/webrenewal/support/library/catalog/products/capacitor/mlcc/c02e.ashx, Features=-, Height - Seated (Max)=-, Lead Spacing=-, Lead Style=-, Manufacturer Part Number=GRM1885C1H202JA01D, Mounting Type="Surface Mount, MLCC", Packaging="Cut Tape (CT)", Part Status=Active, Pricing 1="1=0.1, 10=0.073, 50=0.0394, 100=0.0333, 250=0.02728, 500=0.02334, 1000=0.01818 (USD)", RoHS="RoHS Compliant", Size / Dimension="0.063\" L x 0.031\" W (1.60mm x 0.80mm)", Stock 1=163868, Supplier 1=Digi-Key, Thickness (Max)="0.035\" (0.90mm)"
D1 D2 D3 D4: "LED CHIPLED 570NM GREEN 0603 SMD", Color=Green, Current - Test=20mA, Luminous Flux @ Current - Test=-, Manufacturer="OSRAM Opto Semiconductors Inc", Millicandela Rating=10mcd, Package / Case="0603 (1608 Metric)", Voltage - Forward (Vf) Typ=2.2V, Category=Optoelectronics, ComponentLink1Description=http://catalog.osram-os.com/catalogue/catalogue.do;jsessionid=DE4D071D0D2758CC117C711BF848053E?act=downloadFile&favOid=0200000600005069000100b6, ComponentLink1URL=http://catalog.osram-os.com/catalogue/catalogue.do;jsessionid=DE4D071D0D2758CC117C711BF848053E?act=downloadFile&favOid=0200000600005069000100b6, Height=0.80mm, Lens Style/Size="Rectangle with Flat Top, 1mm x 0.8mm", Lens Type=Diffused, Manufacturer Part Number="LG Q971-KN-1", Mounting Type="Surface Mount", Packaging="Tape & Reel (TR)", Pricing 1="4000=0.03632 (USD)", RoHS="RoHS Compliant", Size / Dimension="1.60mm L x 0.80mm W", Stock 1=44000, Supplier 1=Digi-Key, Viewing Angle=160°, Wavelength - Dominant=570nm, Wavelength - Peak=572nm
P1 P2: "CONN HEADER .100\" DUAL STR 46POS", Color=Black, Manufacturer="Sullins Connector Solutions", Category="Connectors, Interconnects", ComponentLink1Description=http://media.digikey.com/PDF/Data%20Sheets/Sullins%20PDFs/xRxCzzzDxxN-RC_11636-B.pdf, ComponentLink1URL=http://media.digikey.com/PDF/Data%20Sheets/Sullins%20PDFs/xRxCzzzDxxN-RC_11636-B.pdf, Connector Type="Header, Unshrouded", Contact Finish=Tin, Contact Finish Thickness=-, Contact Mating Length="0.230\" (5.84mm)", Contact Type="Male Pin", Fastening Type=-, Features=-, Manufacturer Part Number=PREC023DAAN-RC, Mounting Type="Through Hole", Number of Positions=46, Number of Positions Loaded=All, Number of Rows=2, Packaging=Bulk, Pitch="0.100\" (2.54mm)", Pricing 1="1=0.79, 10=0.706, 100=0.5813, 500=0.45952, 1000=0.39447, 5000=0.35987, 10000=0.34603 (USD)", RoHS="RoHS Compliant", Row Spacing="0.100\" (2.54mm)", Stock 1=0, Supplier 1=Digi-Key, Termination=Solder
R1: "RES SMD 100K OHM 5% 1/10W 0603", Manufacturer="Rohm Semiconductor", Operating Temperature="-55°C ~ 155°C", Package / Case="0603 (1608 Metric)", Power (Watts)="0.1W, 1/10W", Resistance (Ohms)=100k, Supplier Device Package=0603, Supplier Part Number 1=RHM100KCGCT-ND, Temperature Coefficient=±200ppm/°C, Tolerance=±5%, Category=Resistors, ComponentLink1Description=http://rohmfs.rohm.com/en/products/databook/datasheet/passive/resistor/chip_resistor/mcr_g.pdf, ComponentLink1URL=http://rohmfs.rohm.com/en/products/databook/datasheet/passive/resistor/chip_resistor/mcr_g.pdf, Composition="Thick Film", Failure Rate=-, Features=-, Height="0.022\" (0.55mm)", Manufacturer Part Number=MCR03ERTJ104, Number of Terminations=2, Packaging="Cut Tape (CT)", Part Status=Active, Pricing 1="1=0.1, 10=0.019, 25=0.0132, 100=0.0075, 250=0.00576, 500=0.0046, 1000=0.00338 (USD)", RoHS="RoHS Compliant", Size / Dimension="0.063\" L x 0.031\" W (1.60mm x 0.80mm)", Stock 1=136580, Supplier 1=Digi-Key
R2 R4: "RES 10K OHM 1/10W 5% 0603 SMD", Manufacturer="Rohm Semiconductor", Package / Case="0603 (1608 Metric)", Power (Watts)="0.1W, 1/10W", Resistance (Ohms)=10k, Temperature Coefficient=±200ppm/°C, Tolerance=±5%, Category=Resistors, ComponentLink1Description=http://rohmfs.rohm.com/en/products/databook/datasheet/passive/resistor/chip_resistor/mcr_g.pdf, ComponentLink1URL=http://rohmfs.rohm.com/en/products/databook/datasheet/passive/resistor/chip_resistor/mcr_g.pdf, Composition="Thick Film", Features=-, Height="0.022\" (0.55mm)", Manufacturer Part Number=MCR03ERTJ103, Number of Terminations=2, Packaging="Tape & Reel (TR)", Pricing 1="5000=0.00103, 10000=0.00089, 25000=0.00078, 50000=0.00072, 125000=0.0007 (USD)", RoHS="RoHS Compliant", Size / Dimension="0.063\" L x 0.031\" W (1.60mm x 0.80mm)", Stock 1=330000, Supplier 1=Digi-Key, Supplier Device Package="0603 (1608 Metric)"
R3: "RES SMD 11K OHM 5% 1/10W 0603", Manufacturer="Rohm Semiconductor", Operating Temperature="-55°C ~ 155°C", Package / Case="0603 (1608 Metric)", Power (Watts)="0.1W, 1/10W", Resistance (Ohms)=11k, Supplier Device Package=0603, Supplier Part Number 1=RHM11KCGCT-ND, Temperature Coefficient=±200ppm/°C, Tolerance=±5%, Category=Resistors, ComponentLink1Description=http://rohmfs.rohm.com/en/products/databook/datasheet/passive/resistor/chip_resistor/mcr_g.pdf, ComponentLink1URL=http://rohmfs.rohm.com/en/products/databook/datasheet/passive/resistor/chip_resistor/mcr_g.pdf, Composition="Thick Film", Failure Rate=-, Features=-, Height="0.022\" (0.55mm)", Manufacturer Part Number=MCR03ERTJ113, Number of Terminations=2, Packaging="Cut Tape (CT)", Part Status=Active, Pricing 1="1=0.1, 10=0.019, 25=0.0132, 100=0.0075, 250=0.00576, 500=0.0046, 1000=0.00338 (USD)", RoHS="RoHS Compliant", Size / Dimension="0.063\" L x 0.031\" W (1.60mm x 0.80mm)", Stock 1=8319, Supplier 1=Digi-Key
R5: "RES SMD 16K OHM 5% 1/10W 0603", Manufacturer="Rohm Semiconductor", Operating Temperature="-55°C ~ 155°C", Package / Case="0603 (1608 Metric)", Power (Watts)="0.1W, 1/10W", Resistance (Ohms)=16k, Supplier Device Package=0603, Supplier Part Number 1=RHM16KCGCT-ND, Temperature Coefficient=±200ppm/°C, Tolerance=±5%, Category=Resistors, ComponentLink1Description=http://rohmfs.rohm.com/en/products/databook/datasheet/passive/resistor/chip_resistor/mcr_g.pdf, ComponentLink1URL=http://rohmfs.rohm.com/en/products/databook/datasheet/passive/resistor/chip_resistor/mcr_g.pdf, Composition="Thick Film", Failure Rate=-, Features=-, Height="0.022\" (0.55mm)", Manufacturer Part Number=MCR03ERTJ163, Number of Terminations=2, Packaging="Cut Tape (CT)", Part Status=Active, Pricing 1="1=0.1, 10=0.019, 25=0.0132, 100=0.0075, 250=0.00576, 500=0.0046, 1000=0.00338 (USD)", RoHS="RoHS Compliant", Size / Dimension="0.063\" L x 0.031\" W (1.60mm x 0.80mm)", Stock 1=7457, Supplier 1=Digi-Key
R6: "RES SMD 270 OHM 5% 1/10W 0603", Manufacturer="Rohm Semiconductor", Operating Temperature="-55°C ~ 155°C", Package / Case="0603 (1608 Metric)", Power (Watts)="0.1W, 1/10W", Resistance (Ohms)=270, Supplier Device Package=0603, Supplier Part Number 1=RHM270CGCT-ND, Temperature Coefficient=±200ppm/°C, Tolerance=±5%, Category=Resistors, ComponentLink1Description=http://rohmfs.rohm.com/en/products/databook/datasheet/passive/resistor/chip_resistor/mcr_g.pdf, ComponentLink1URL=http://rohmfs.rohm.com/en/products/databook/datasheet/passive/resistor/chip_resistor/mcr_g.pdf, Composition="Thick Film", Failure Rate=-, Features=-, Height="0.022\" (0.55mm)", Manufacturer Part Number=MCR03ERTJ271, Number of Terminations=2, Packaging="Cut Tape (CT)", Part Status=Active, Pricing 1="1=0.1, 10=0.019, 25=0.0132, 100=0.0075, 250=0.00576, 500=0.0046, 1000=0.00338 (USD)", RoHS="RoHS Compliant", Size / Dimension="0.063\" L x 0.031\" W (1.60mm x 0.80mm)", Stock 1=34918, Supplier 1=Digi-Key
R7: "RES SMD 18 OHM 5% 1/10W 0603", Manufacturer="Rohm Semiconductor", Operating Temperature="-55°C ~ 155°C", Package / Case="0603 (1608 Metric)", Power (Watts)="0.1W, 1/10W", Resistance (Ohms)=18, Supplier Device Package=0603, Supplier Part Number 1=RHM18CGCT-ND, Temperature Coefficient=±200ppm/°C, Tolerance=±5%, Category=Resistors, ComponentLink1Description=http://rohmfs.rohm.com/en/products/databook/datasheet/passive/resistor/chip_resistor/mcr_g.pdf, ComponentLink1URL=http://rohmfs.rohm.com/en/products/databook/datasheet/passive/resistor/chip_resistor/mcr_g.pdf, Composition="Thick Film", Failure Rate=-, Features=-, Height - Seated (Max)="0.022\" (0.55mm)", Manufacturer Part Number=MCR03ERTJ180, Number of Terminations=2, Packaging="Cut Tape (CT)", Part Status=Active, Pricing 1="1=0.1, 10=0.017, 25=0.012, 50=0.0092, 100=0.0068, 250=0.00524, 500=0.00418, 1000=0.00307 (USD)", RoHS="RoHS Compliant", Size / Dimension="0.063\" L x 0.031\" W (1.60mm x 0.80mm)", Stock 1=8252, Supplier 1=Digi-Key
R8 R11 R12: "RES 1K OHM 1/10W 5% 0603 SMD", Manufacturer="Rohm Semiconductor", Operating Temperature="-55°C ~ 155°C", Package / Case="0603 (1608 Metric)", Power (Watts)="0.1W, 1/10W", Resistance (Ohms)=1k, Temperature Coefficient=±200ppm/°C, Tolerance=±5%, Category=Resistors, ComponentLink1Description=http://rohmfs.rohm.com/en/products/databook/datasheet/passive/resistor/chip_resistor/mcr_g.pdf, ComponentLink1URL=http://rohmfs.rohm.com/en/products/databook/datasheet/passive/resistor/chip_resistor/mcr_g.pdf, Composition="Thick Film", Features=-, Height="0.022\" (0.55mm)", Manufacturer Part Number=MCR03ERTJ102, Number of Terminations=2, Packaging="Cut Tape (CT)", Pricing 1="1=0.1, 10=0.01, 25=0.0072, 100=0.0042, 250=0.00316, 500=0.00254, 1000=0.00187 (USD)", RoHS="RoHS Compliant", Size / Dimension="0.063\" L x 0.031\" W (1.60mm x 0.80mm)", Stock 1=72962, Supplier 1=Digi-Key, Supplier Device Package="0603 (1608 Metric)"
R9 R10: "RES SMD 2.7 OHM 5% 1/10W 0603", Manufacturer="Rohm Semiconductor", Operating Temperature="-55°C ~ 155°C", Package / Case="0603 (1608 Metric)", Power (Watts)="0.1W, 1/10W", Resistance (Ohms)=2.7, Supplier Device Package=0603, Supplier Part Number 1=RHM2.7CGCT-ND, Temperature Coefficient=±400ppm/°C, Tolerance=±5%, Category=Resistors, ComponentLink1Description=http://rohmfs.rohm.com/en/products/databook/datasheet/passive/resistor/chip_resistor/mcr_g.pdf, ComponentLink1URL=http://rohmfs.rohm.com/en/products/databook/datasheet/passive/resistor/chip_resistor/mcr_g.pdf, Composition="Thick Film", Failure Rate=-, Features=-, Height - Seated (Max)="0.022\" (0.55mm)", Manufacturer Part Number=MCR03ERTJ2R7, Number of Terminations=2, Packaging="Cut Tape (CT)", Part Status=Active, Pricing 1="1=0.1, 10=0.017, 25=0.012, 50=0.0092, 100=0.0068, 250=0.00524, 500=0.00418, 1000=0.00307 (USD)", RoHS="RoHS Compliant", Size / Dimension="0.063\" L x 0.031\" W (1.60mm x 0.80mm)", Stock 1=12955, Supplier 1=Digi-Key
RJ1 RJ2 RJ3 RJ4 RJ5 RJ6 RJ7 RJ8: "Resistor Jumper", Package / Case="0603 (1608 Metric)", Applications="General Purpose", Mounting Type="Surface Mount, MLCC"
U1: "IC REG LDO 1.8V 0.25A SOT23-5", Current - Limit (Min)=-, Current - Output=250mA, Manufacturer="Texas Instruments", Operating Temperature="-40°C ~ 125°C", Package / Case="SC-74A, SOT-753", Supplier Device Package=SOT-23, Supplier Part Number 1=296-41463-1-ND, Voltage - Input="2.2 V ~ 5.5 V", Voltage - Output=1.8V, Category="Integrated Circuits (ICs)", ComponentLink1Description=http://www.ti.com/lit/ds/symlink/lp5907.pdf, ComponentLink1URL=http://www.ti.com/lit/ds/symlink/lp5907.pdf, Manufacturer Part Number=LP5907MFX-1.8/NOPB, Mounting Type="Surface Mount", Number of Regulators=1, Packaging="Cut Tape (CT)", Part Status=Active, Pricing 1="1=0.57, 10=0.488, 100=0.3641, 500=0.28602, 1000=0.1575 (USD)", Regulator Topology="Positive Fixed", RoHS="RoHS Compliant", Stock 1=13246, Supplier 1=Digi-Key, Voltage - Dropout (Typical)=-
U2: library part DW1000_QFN_48, "UWB DW1000", Manufacturer="Decawave Ltd.", Part Number=DW1000_QFN, Component Code=n/a, ComponentLink1Description="Datasheet Link", Component Type=Standard
U3: "Operational Amplifiers - Op Amps Low Volt Dual Op Amp", en - Input Voltage Noise Density="24 nV/sqrt Hz at 5 V", Ib - Input Bias Current="100 nA", In - Input Noise Current Density="0.25 pA/sqrt Hz", Ios - Input Offset Current="50 nA", Manufacturer="Texas Instruments", Maximum Operating Temperature="+ 85 C", Minimum Operating Temperature="- 40 C", Operating Supply Current="250 uA", Operating Supply Voltage="2.7 V, 5 V", Output Current per Channel="45 mA", Package / Case=MSOP-8, PSRR - Power Supply Rejection Ratio="75 dB", Supplier Part Number 1=926-LMV822MM/NOPB, Supply Voltage - Max="5.5 V", Supply Voltage - Min="2.5 V", Voltage Gain dB="105 dB", Vos - Input Offset Voltage="3.5 mV", Amplifier Type="General Purpose", Brand="Texas Instruments", Category="Operational Amplifiers - Op Amps", CMRR - Common Mode Rejection Ratio="72 dB", GBP - Gain Bandwidth Product="5.6 MHz", Height="0.86 mm", Input Type=Rail-to-Rail, Length="3 mm", Manufacturer Part Number=LMV822MM/NOPB, Minimum Order Quantity=1, Mounting Style=SMD/SMT, Number of Channels="2 Channel", Output Type=Rail-to-Rail, Packaging=Reel, Pricing 1="1=1.40, 10=1.26, 25=1.16, 50=1.04, 100=0.984, 250=0.920, 500=0.813, 1000=0.535 (USD)", Product="Operational Amplifiers", Reeling=True, RoHS="RoHS Compliant", RoHS - Mouser=Y, Series=LMV822-N, Shutdown="No Shutdown", SR - Slew Rate="2 V/us", Standard Pack Qty=1000, Stock 1=1996, Supplier 1=Mouser, Supply Type=Single, Width="3 mm"

## Via types
v1: diameter 22, hole 10, Component Side to Solder Side, tented both sides, 161 vias
v2: diameter 22, hole 8, Component Side to Solder Side, tented both sides, 70 vias
v3: diameter 23.62, hole 11.81, Component Side to Solder Side, 9 vias
v4: diameter 38, hole 18, Component Side to Solder Side, tented both sides, 2 vias

## Nets (pads, with @x,y where several pads share a name; then routed paths per layer and width w, separated by ;. In a path a pad name is that pad's centre, name@x,y a point inside that pad or via, vN(x,y) a via of type N, cw(c..) or ccw(c..) an arc to the next point about the centre after c; other vN are vias at no path point)
1V8: C4.2 C5.2 C6.2 C7.2 C22.2 C23.2 C24.2 U1.5 U2.26 U2.48 | length 1363.9
  Component Side w8: C5.2@1817.11,774.42 1977.69,935 2010,935 v2(2025,950) 2078.39,1003.39 U2.48@2140,1003.39 ; C5.2@1819.49,769.42 C5.2@1819.77,769.42 ; C5.2@1822.11,769.42 C5.2@1819.77,769.42 ; C6.2 C7.2 C7.2@1892.27,695 ; C6.2@1857.73,735 1854.19,735 C5.2@1819.77,769.42 ; C24.2 C23.2 2241.5,1393.5 C22.2@2245,1390 ; C22.2 v2@2335.87,1302.64 ; v2(2335,1300) 2335,1301.77 v2@2335.87,1302.64 ; U2.26@2335.87,1207.89 v2@2335.87,1302.64
  Component Side w15: v2(2015,1683.5) C4.2 ; C4.2@2075,1685 2082.4,1677.6 U1.5
  Solder Side w8: v2(2015,1683.5) 2211.5,1683.5 2335,1560
3V3: C3.2 C8.2 C9.2 C10.2 C15.2 C16.2 C17.2 C27.2 C28.2 C29.2 C31.2 C32.2 C33.2 C34.2 C35.2 C36.2 C37.2 C38.2 C39.2 D1.1 D2.1 D3.1 D4.1 P2.3 P2.4 U1.1 U2.15 U2.18 U2.19 U2.25 U2.28 U2.47 U3.8 | length 2978.8
  Component Side w8: D4.1 v2(1080,1875) ; D3.1 v2(1230,1875) ; D2.1 v2(1385,1875) ; D1.1@1525,1825 v2(1525,1875) ; C9.2@1840,904.37 1841.5,902.87 C10.2 ; C8.2@1840,956.57 1841.5,955.07 C9.2 ; C8.2 v2@1900,959.37 ; v2(1900,960) v2@1900,959.37 ; C17.2@1965,1393.5 C17.2 C16.2 C15.2@2066,1393.5 ; C15.2 2129.38,1344.13 v2(2209.88,1344.13) 2304.37,1249.64 U2.28 ; U2.47@2145,1019.13 2044.13,1019.13 1984.37,959.37 v2@1900,959.37 ; C29.2 2358.5,1393.5 C28.2@2360,1395 ; U2.25@2351.61,1215 2351.61,1255 2365,1268.39 v2(2365,1340) C28.2 C27.2 ; U2.15 2415.12,1034.88 v2(2493.43,956.57) C33.2 ; U2.18 2457.13,1082.13 2510,1135 2610,1135 v2(2650,1175) 2658.5,1175 C34.2 C35.2 C36.2 ; U2.19 2452.61,1097.87 v2(2626.59,1271.85) C37.2 C38.2 ; C39.2 C38.2@2586.39,1390 ; C33.2@2693.83,955 2697.81,951.02 C32.2 C31.2
  Component Side w15: U1.1 2289.09,1677.6 C3.2 v2(2345,1683.5)
  Component Side w18: v2(2370,296.61) U3.8
ANT: A2.1 B1.1 | length 275.5
  Component Side w19.87: B1.1 A2.1@3006.06,1095.43
CLK: C43.1 U2.3 U3.6 U3.7 | length 1455.4
  Component Side w8: U2.3 2209.88,934.88 2140,865 2000,865 1940,805 1940,610 2000,550 2215,550 2300,465 2300,373.82 2351.61,322.2 U3.7 2467.84,322.2 2495,349.36 2495,373.5 ; U3.6 2469.29,347.8 2495,373.5 ; C43.1@2495,440 2495,373.5
CLK_SQ: A1.1 R11.1 | length 61
  Component Side w8: R11.1 A1.1@2930.49,395
EXTON: U1.3 U2.21 | length 973.8
  Component Side w8: U2.21 2429.37,1129.37 2475,1175 v2(2475,1301.77)
  Component Side w15: v2(2185,1755) U1.3@2230,1755
  Solder Side w8: v2(2185,1755) 2350,1755 2393.83,1711.17 2393.83,1350 2442.06,1301.77 v2(2475,1301.77)
GND: A1.2 A1.3 A2.2 A2.3 A2.4 A2.5 B1.2 B1.5 C1.1 C2.1 C3.1 C4.1 C5.1 C6.1 C7.1 C8.1 C9.1 C10.1 C11.1 C12.1 C13.1 C14.1 C15.1 C16.1 C17.1 C22.1 C23.1 C24.1 C25.1 C26.1 C27.1 C28.1 C29.1 C31.1 C32.1 C33.1 C34.1 C35.1 C36.1 C37.1 C38.1 C39.1 C40.1 C42.1 C44.1 P1.1 P1.2 P2.1 P2.2 P2.43 P2.44 P2.45 P2.46 R1.2 R3.1 R12.1 U1.2 U2.22 U2.32 U2.43 U2.46 U2.49 U3.4 | length 2843.2
  Component Side w8: v2(1720,1515) C14.1 ; v2(1725,850) 1725.63,849.37 C10.1 ; v2(1725,904.37) C9.1 ; v2(1725,959.37) C8.1 ; v2(1725,1016.2) R1.2 ; v2(1725,1074.37) C1.1 ; v2(1725,1129.37) C2.1 ; v2(1725.63,685) 1725.63,685.56 C5.1 ; v2(1764.2,645) 1764.2,646.35 C6.1 ; v2(1805.81,610) 1805.81,610.18 C7.1 ; C17.1 v2(1970,1520) ; v2(1989.97,638.9) R3.1 ; C16.1 v2(2025,1520) ; v2(2048.48,638.9) C11.1 ; C15.1 v2(2080,1520) ; v2(2103.48,638.9) C12.1 ; C24.1 v2(2135,1520) ; U2.46 2204.88,1034.88 U2.49@2205,1035 ; U2.43 U2.49@2204.88,1082.13 ; C23.1 v2(2190,1520) ; U2.49@2240,1150 2241.38,1151.38 U2.32 ; C22.1 v2(2245,1520) ; C29.1 v2(2310,1520) ; U2.49@2325,1145 2325.12,1145.12 U2.22 ; v2(2354.89,638.9) C25.1 ; C28.1 v2(2365,1520) ; v2(2409.89,638.9) 2410,639 C13.1@2410,700 ; C27.1 v2(2420,1520) ; v2(2464.89,638.9) 2465,639 C26.1@2465,700 ; C40.1 v2(2480,1520) ; C39.1 v2(2635,1513.78) ; C38.1 2633.24,1433.24 v2(2675,1475) ; C37.1 v2(2715,1438.22) ; C31.1 v2(2820,846.57) ; C32.1 v2(2820,901.57) ; C33.1 v2(2820,956.57) ; C34.1 v2(2820,1215) ; C35.1 v2(2820,1270) ; C36.1 v2(2820,1325)
  Component Side w15: C4.1 v2(2075,1800) ; v2(2185,1715) U1.2 ; C3.1 v2(2295,1800) ; C44.1 v2(2370,499.74) ; U3.4 v2(2675.21,373.39) ; C42.1 v2(2917.81,335) A1.3@2993.83,335 ; R12.1 v2(2917.81,455) A1.2@2995,455
  other v1: 2612.99,662.99 2662.99,662.99 2712.99,662.99 2762.99,662.99 2812.99,662.99 2862.99,662.99 2912.99,662.99 2962.99,662.99 3012.99,662.99 2687.99,712.99 2737.99,712.99 2787.99,712.99 2837.99,712.99 2887.99,712.99 2937.99,712.99 2987.99,712.99 3037.99,712.99 2712.99,762.99 2762.99,762.99 2812.99,762.99 2862.99,762.99 2912.99,762.99 2962.99,762.99 3012.99,762.99 2537.99,812.99 2887.99,812.99 2937.99,812.99 2987.99,812.99 3037.99,812.99 2612.99,862.99 2912.99,862.99 2962.99,862.99 3012.99,862.99 2537.99,912.99 2587.99,912.99 2637.99,912.99 2909,1048.15 2761.47,1054.03 2798.47,1054.03 2835.47,1054.03 2872.47,1054.03 2701.1,1136.58 2772.52,1136.83 2809.52,1136.83 2846.52,1136.83 2883.52,1136.83 2736.77,1146.39 2917.81,1150.74 2562.99,1162.99 2637.99,1212.99 2562.99,1262.99 2587.99,1312.99 2937.99,1312.99 2987.99,1312.99 3037.99,1312.99 2912.99,1362.99 2962.99,1362.99 3012.99,1362.99 2787.99,1412.99 2837.99,1412.99 2887.99,1412.99 2937.99,1412.99 2987.99,1412.99 3037.99,1412.99 2812.99,1462.99 2862.99,1462.99 2912.99,1462.99 2962.99,1462.99 3012.99,1462.99 2737.99,1512.99 2787.99,1512.99 2837.99,1512.99 2887.99,1512.99 2937.99,1512.99 2987.99,1512.99 3037.99,1512.99 2562.99,1562.99 2712.99,1562.99 2762.99,1562.99 2812.99,1562.99 2862.99,1562.99 2912.99,1562.99 2962.99,1562.99 3012.99,1562.99 2537.99,1612.99 2587.99,1612.99 2637.99,1612.99 2687.99,1612.99 2737.99,1612.99 2787.99,1612.99 2837.99,1612.99 2887.99,1612.99 2937.99,1612.99 2987.99,1612.99 3037.99,1612.99 2512.99,1662.99 2562.99,1662.99 2612.99,1662.99 2662.99,1662.99 2712.99,1662.99 2762.99,1662.99 2812.99,1662.99 2862.99,1662.99 2912.99,1662.99 2962.99,1662.99 3012.99,1662.99 2537.99,1712.99 2587.99,1712.99 2637.99,1712.99 2687.99,1712.99 2737.99,1712.99 2787.99,1712.99 2837.99,1712.99 2887.99,1712.99 2937.99,1712.99 2987.99,1712.99 3037.99,1712.99 2512.99,1762.99 2562.99,1762.99 2612.99,1762.99 2662.99,1762.99 2712.99,1762.99 2762.99,1762.99 2812.99,1762.99 2862.99,1762.99 2912.99,1762.99 2962.99,1762.99 3012.99,1762.99 2537.99,1812.99 2587.99,1812.99 2637.99,1812.99 2687.99,1812.99 2737.99,1812.99 2787.99,1812.99 2837.99,1812.99 2887.99,1812.99 2937.99,1812.99 2987.99,1812.99 3037.99,1812.99 2512.99,1862.99 2562.99,1862.99 2612.99,1862.99 2662.99,1862.99 2712.99,1862.99 2762.99,1862.99 2812.99,1862.99 2862.99,1862.99 2912.99,1862.99 2962.99,1862.99 3012.99,1862.99 2537.99,1912.99 2587.99,1912.99 2637.99,1912.99 2687.99,1912.99 2737.99,1912.99 2787.99,1912.99 2837.99,1912.99 2887.99,1912.99 2937.99,1912.99 2987.99,1912.99 3037.99,1912.99
  other v3: 2217.76,1040.79 2265,1040.79 2312.24,1040.79 2217.76,1088.03 2265,1088.03 2312.24,1088.03 2217.76,1135.28 2312.24,1135.28 2265,1139.21
  other v4: 2880,995 2880,1195
GPIO0: P1.11 RJ8.2 | length 545.9
  Component Side w8: RJ8.2 1150,1607.01 1150,1848.81 P1.11@1295,1993.81
GPIO0_R: RJ8.1 U2.38 | length 1399.8
  Component Side w8: RJ8.1 1045,1565 1045,1430 1206,1269 1741.8,1269 1805.99,1204.81 2060.39,1204.81 2104.33,1160.87 U2.38
GPIO1: P1.12 RJ7.2 | length 630.9
  Component Side w8: RJ7.2 1237.01,1537.01 1300,1600 1300,1850 1345,1895 1345,2043.83 P1.12@1293.83,2095
GPIO1_R: RJ7.1 U2.37 | length 1243.3
  Component Side w8: RJ7.1 1195,1565 1195,1430 1342,1283 1747.6,1283 1811.79,1218.81 2066.19,1218.81 2108.39,1176.61 U2.37
GPIO2: P1.13 RJ6.2 | length 490.8
  Component Side w8: RJ6.2 1431,1583.01 1431,1957.81 P1.13@1395,1993.81
GPIO2_R: RJ6.1 U2.36 | length 1117.6
  Component Side w8: RJ6.1 1350,1565 1350,1430 1483,1297 1753.4,1297 1817.59,1232.81 2172.19,1232.81 2178.39,1226.61 U2.36
GPIO3: P1.14 U2.35 | length 1544.3
  Component Side w8: P1.14@1390,2093.81 1445,2038.81 1445,1427.99 1561.99,1311 1759.2,1311 1823.39,1246.81 2178.57,1246.81 2194.13,1231.25 U2.35
GPIO4: P1.26 RJ5.2 | length 986.9
  Component Side w8: RJ5.2 1570,1582.01 1570,1940 1545,1965 1545,2015 1580,2050 1953.83,2050 P1.26@1993.83,2090
GPIO4_R: RJ5.1 U2.34 | length 1014.2
  Component Side w8: RJ5.1 1490,1565 1490,1430 1595,1325 1765,1325 1829.19,1260.81 2184.37,1260.81 2209.88,1235.3 U2.34
GPIO5: R2.1 U2.33 | length 492.1
  Component Side w8: R2.1@1813.38,1340 1813.38,1331.62 1870.19,1274.81 2190.17,1274.81 2225.63,1239.35 U2.33
GPIO6: R4.1 U2.30 | length 508.9
  Component Side w8: R4.1@1897.27,1425 1897.27,1377.73 1972.19,1302.81 2201.77,1302.81 2272.87,1231.71 U2.30
IRQ: P1.15 R1.1 U2.45 | length 1488.1
  Component Side w8: R1.1@1842.73,1016.2 v2(1950,1016.2) 1996.2,1016.2 2030.63,1050.63 U2.45
  Solder Side w8: P1.15@1493.83,1995 1493.83,1956.17 1949,1501 1949,1017.2 v2(1950,1016.2)
NetB1_3: B1.3 C41.1 | length 80.8
  Component Side w10: C41.1 B1.3@2677.28,1095
NetB1_4: B1.4 C30.1 | length 82.9
  Component Side w10: C30.1 B1.4
NetC14_2: C14.2 R2.2 R4.2 U2.31 | length 674.1
  Component Side w8: R2.2 1807.27,1423.88 C14.2@1807.27,1425 ; R4.2@1855,1472.27 1810.46,1427.73 C14.2 1946.19,1288.81 2195.97,1288.81 2257.13,1227.66 U2.31@2257.13,1215
NetC18_2: C18.2 R5.2 U2.8 | length 309.7
  Component Side w8: R5.2@2165,760 2167.6,757.4 C18.2 ; C18.2@2230.81,755 2288.62,812.81 U2.8
NetC19_1: C19.1 R5.1 | length 67.1
  Component Side w8: R5.1 C19.1 2233.48,695.91 C19.1@2234.97,697.4
NetC20_1: C20.1 R6.1 | length 64.3
  Component Side w8: C20.1 R6.1 R6.1@2669.5,775
NetC21_1: C21.1 R6.2 U2.12 | length 415
  Component Side w8: U2.12 2351.61,949.25 2425.87,875 2568.37,875 R6.2@2624.6,818.78 ; C21.1@2580,774.42 2624.35,818.78 R6.2@2624.6,818.78 ; R6.2 R6.2@2624.6,818.78
NetC30_2: C30.2 U2.16 | length 163
  Component Side w8: U2.16@2385,1050.63 2503.5,1050.63 C30.2@2535,1019.13
NetC41_2: C41.2 U2.17 | length 162
  Component Side w8: U2.17@2380,1066.38 U2.17 2500.95,1066.38 C41.2@2530,1095.43
NetC42_2: C42.2 R7.1 U3.2 | length 259.8
  Component Side w8: U3.2 2710.21,322.2 2723.01,335 C42.2 2806.5,276.5 R7.1@2805,275
NetC43_2: C43.2 R9.2 R10.1 | length 120.9
  Component Side w8: R9.2@2495,500 R10.1 ; C43.2 R10.1@2556.5,499.74
  Component Side w18: R10.1@2556.24,500 R10.1@2556.5,499.74
NetC44_2: C44.2 R9.1 U3.5 | length 217.3
  Component Side w8: C44.2 2435.91,373.5 U3.5@2437.4,375 ; C44.2@2375,373.82 2430.83,429.65 R9.1
NetD1_2: D1.2 RJ5.3 | length 97
  Component Side w8: RJ5.3 D1.2@1525,1760
NetD2_2: D2.2 RJ6.3 | length 104.1
  Component Side w8: RJ6.3 1385,1760 D2.2@1390,1765
NetD3_2: D3.2 RJ7.3 | length 102
  Component Side w8: RJ7.3 D3.2@1230,1765
NetD4_2: D4.2 RJ8.3 | length 102.6
  Component Side w8: D4.2@1075,1763.5 1080,1758.5 RJ8.3
NetR3_2: R3.2 U2.5 | length 411.7
  Component Side w8: R3.2@1989.97,758.61 R3.2 1989.97,804.97 2024,839 2181.57,839 2241.38,898.81 U2.5
NetR7_2: R7.2 R8.2 R10.2 U3.1 | length 463.8